# Allegro board HEARINGDEVICE.brd
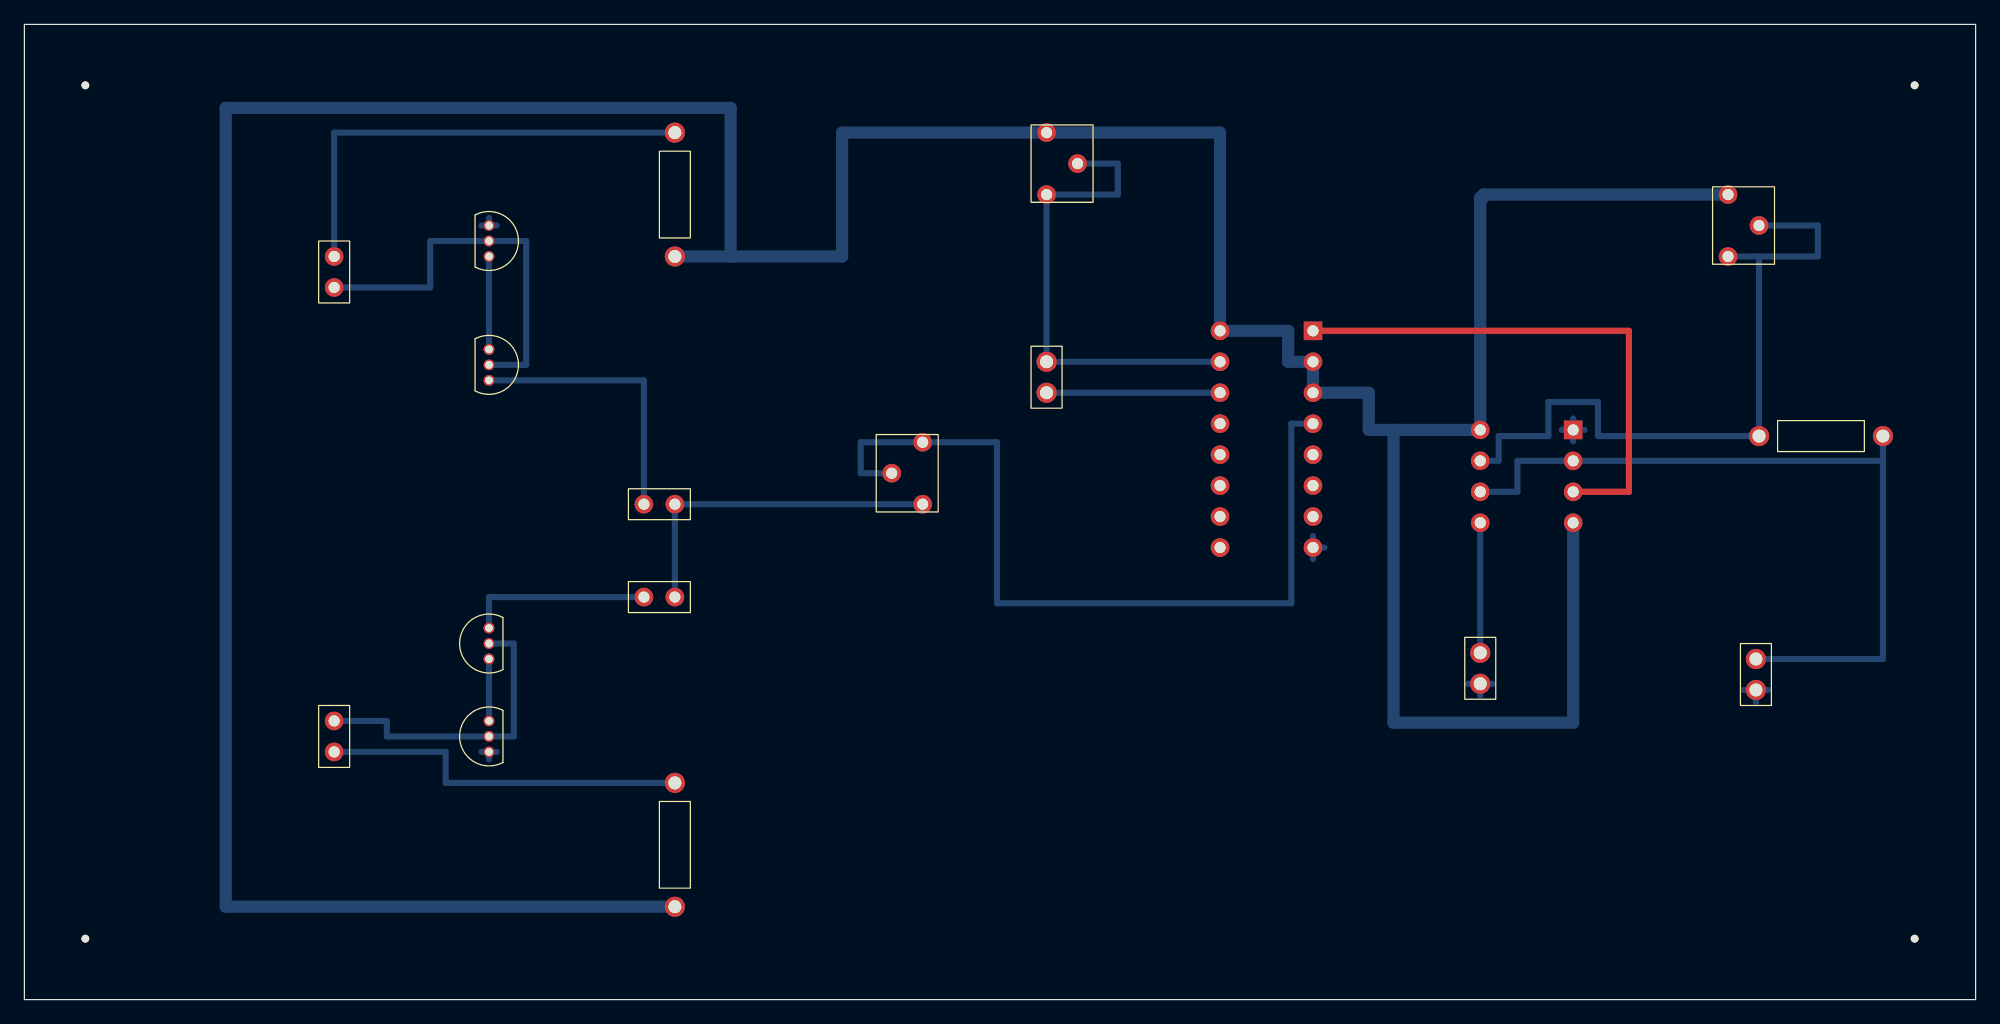
[diagram p0: board, top side]
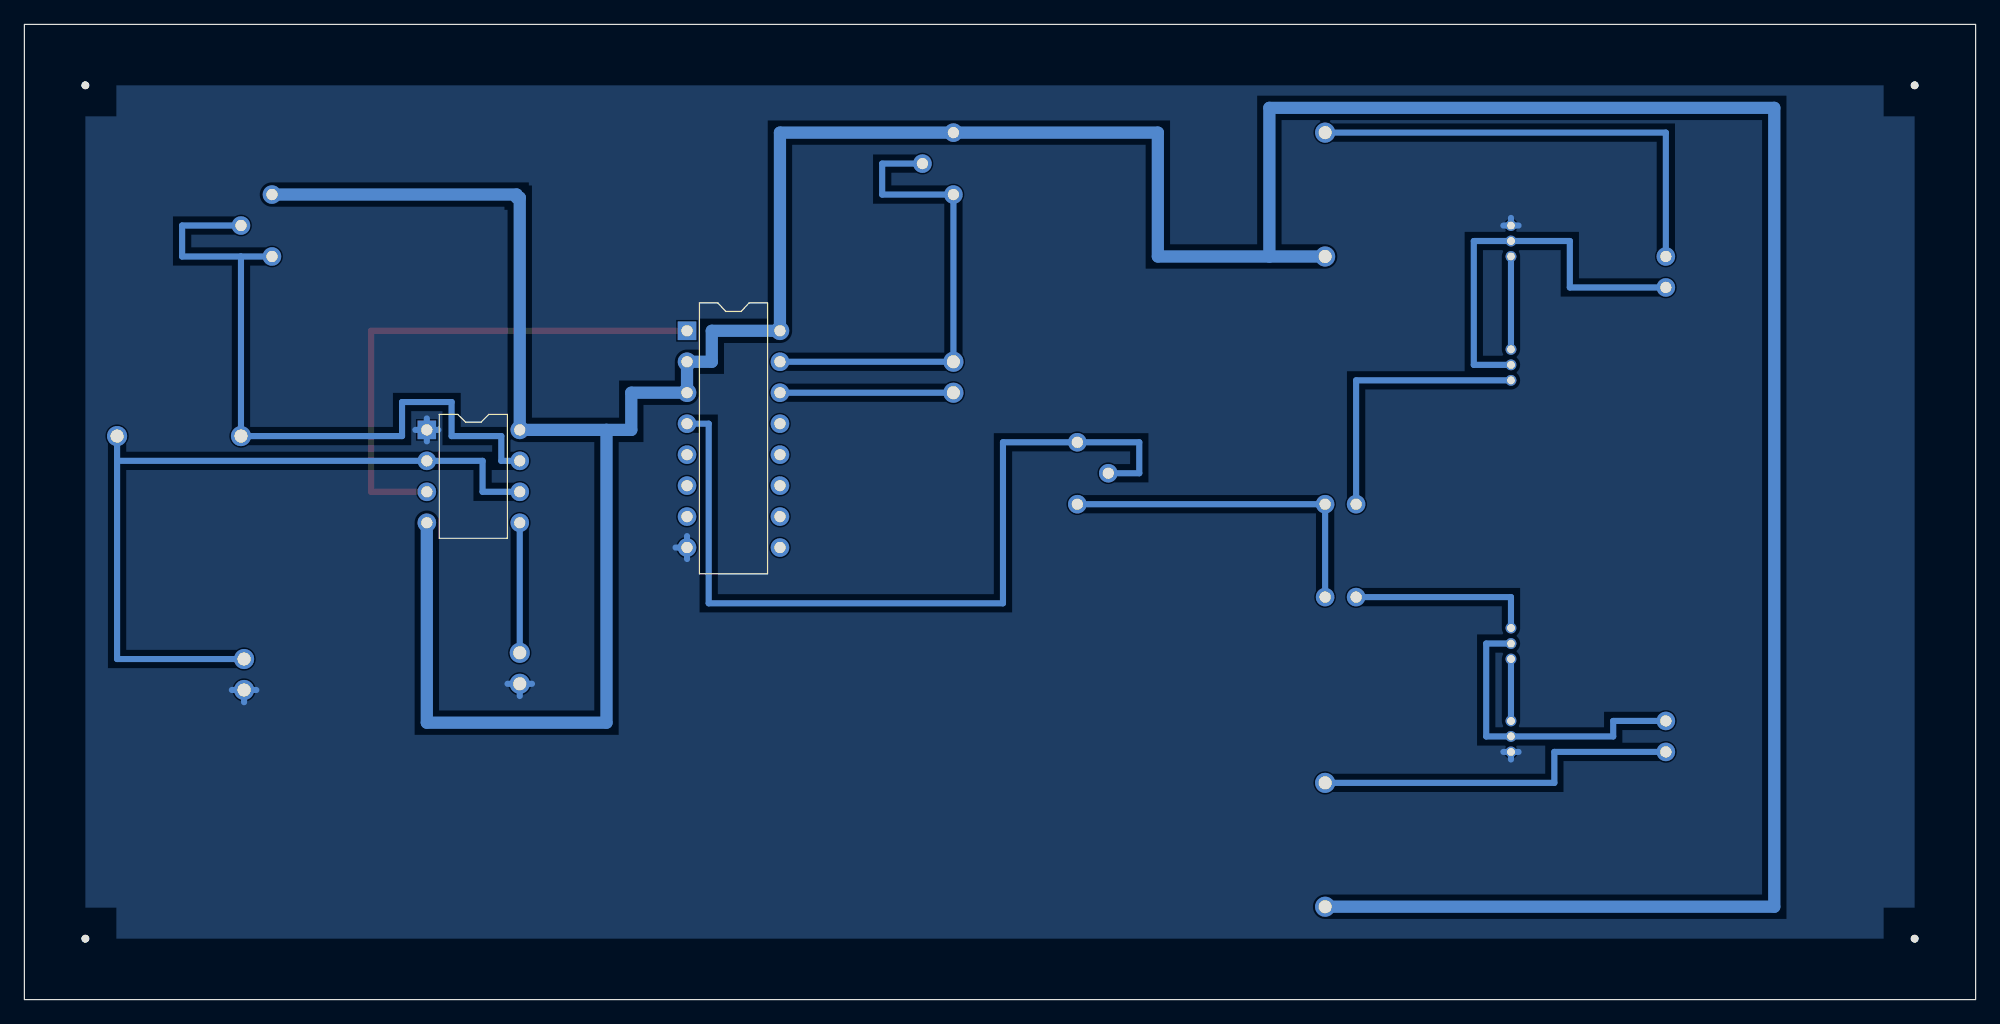
[diagram p1: board, bottom side, seen from below]

Outline 160 x 80 mm; copper layers: TOP, BOTTOM. Coordinates in mm from the lower left corner of the outline.
Outline path: rectangle 0,0 160,80

## Design rules (mm)
nets with their own width: min track width 1; nets GND VCC

## Placement (name value [footprint] x y rotation side)
C1  0.1u  [CAPCK05]  83.82 52.32 180 top
C2  0.1u  [CAPCK05]  141.99 27.94 180 top
C3  0.1u  [CAPCK05]  119.38 28.45 180 top
J1  CON2  [JUMPER2]  25.4 60.96 270 top
J2  CON2  [JUMPER2]  25.4 20.32 90 top
NOREF  -  []  2 78 0 top
NOREF#2  -  []  0 80 0 top
NOREF#3  -  [unnamed#2]  5 75 0 top
NOREF#4  -  [unnamed#2]  155 5 0 top
NOREF#5  -  [unnamed#2]  155 75 0 top
NOREF#6  -  []  160 0 90 top
NOREF#7  -  [unnamed#2]  5 5 0 top
Q1  NPN BCE  [TO92]  38.1 53.34 0 top
Q2  NPN BCE  [TO92]  38.1 63.5 0 top
Q3  NPN BCE  [TO92]  38.1 27.94 180 top
Q4  NPN BCE  [TO92]  38.1 20.32 180 top
R1  22  [RES400]  53.34 60.96 0 top
R2  100k  [RESADJ]  139.7 60.96 180 top
R3  100k  [RESADJ]  83.82 66.04 180 top
R4  1k  [RES400]  142.24 46.23 270 top
R5  1k  [RESADJ]  73.66 45.72 0 top
R6  22  [RES400]  53.34 7.62 0 top
SW1  SW PUSHBUTTON  [JUMPER2]  53.34 40.64 180 top
SW2  SW PUSHBUTTON  [JUMPER2]  50.8 33.02 0 top
U1  NE555  [DIP8_3]  127 46.74 180 bottom
U2  74123  [DIP16_3]  105.66 54.86 180 bottom

## Library data of the parts
C1-C3 = CAP NP: Tolerance: ***; User Part Number: ***
J1 J2 = CON2: User Part Number: ***
Q1-Q3 = NPN BCE_1
Q4 = NPN BCE_3
R1 R4 R6 = R: Tolerance: ***; User Part Number: ***
R2 R3 R5 = RESISTOR VAR: Tolerance: ***; User Part Number: ***
SW1 SW2 = SW PUSHBUTTON: User Part Number: ***
U1 = NE555_1: Tolerance: ***; User Part Number: ***
U2 = 74123_3: Tolerance: ***; User Part Number: ***

## Footprints (pads in the part's own frame, mm; a bottom-side part is the same pattern mirrored in y, then rotated)
CAPCK05
  round 1.651 hole 1.067: 1(0,0) 2(0,2.54)
DIP8_3
  rect 1.524x1.524 hole 0.914: 1(0,0)
  round 1.524 hole 0.914: 2(0,-2.54) 3(0,-5.08) 4(0,-7.62) 5(7.62,-7.62) 6(7.62,-5.08) 7(7.62,-2.54) 8(7.62,0)
DIP16_3
  rect 1.524x1.524 hole 0.914: 1(0,0)
  round 1.524 hole 0.914: 2(0,-2.54) 3(0,-5.08) 4(0,-7.62) 5(0,-10.16) 6(0,-12.7) 7(0,-15.24) 8(0,-17.78) 9(7.62,-17.78) 10(7.62,-15.24) 11(7.62,-12.7) 12(7.62,-10.16) 13(7.62,-7.62) 14(7.62,-5.08) 15(7.62,-2.54) 16(7.62,0)
JUMPER2
  round 1.524 hole 0.914: 1(0,0) 2(2.54,0)
RES400
  round 1.651 hole 1.067: 1(0,0) 2(0,10.16)
RESADJ
  round 1.524 hole 0.914: 1(0,0) 2(-2.54,-2.54) 3(0,-5.08)
TO92
  round 0.889 hole 0.635: 1(0,0) 2(0,-1.27) 3(0,-2.54)
unnamed#2
  round 0.635 hole 3.175 unplated: (0,0)

## Nets
GND: C2.2 C3.2 Q2.1(E) Q4.1(E) U1.1(GND) U2.8(GND)
VCC: R1.1 R2.3(B) R3.3(B) R6.1 U1.4(RST) U1.8(VCC) U2.2(B) U2.3(C\L\R\) U2.16(VCC)
N00839: R2.1(A) R2.2(WIPER) R4.1 U1.7(DSCHG)
N00856: C2.1 R4.2 U1.2(TRG) U1.6(THR)
N00875: C3.1 U1.5(CV)
N00964: U1.3(OUT) U2.1(A\)
N01014: R5.1(A) R5.2(WIPER) U2.4(Q\)
N01018: C1.2 U2.14(C)
N01027: C1.1 R3.1(A) R3.2(WIPER) U2.15(R/C)
N01057: R5.3(B) SW1.1 SW2.2
N01080: Q1.3(B) SW1.2
N01087: Q1.1(E) Q2.3(B)
N01091: J1.2 Q1.2(C) Q2.2(C)
N01139: Q3.3(B) SW2.1
N01146: Q3.1(E) Q4.3(B)
N01156: J2.2 Q3.2(C) Q4.2(C)
N01647: J2.1 R6.2
N015031: J1.1 R1.2

Pads without a net: U2 5 6 7 9 10 11 12 13

## Routing (per net, layer and track width the routed paths; a pad name or vN(x,y) marks a point on that pad's centre or on a via; arc(x,y) is an arc through that point)
GND: length 16.3
  BOTTOM w0.5: 141.99,24.4 C2.2 ; C2.2 140.98,25.4 ; C2.2 142.99,25.4 ; U1.1 127.94,46.74 ; U1.1 127,45.8 ; U1.1 126.06,46.74 ; U1.1 127,47.68 ; 37.48,63.5 Q2.1 ; Q2.1 38.72,63.5 ; Q2.1 38.1,64.12 ; 119.38,24.9 C3.2 ; C3.2 118.38,25.91 ; C3.2 120.38,25.91 ; 38.1,19.7 Q4.1 ; Q4.1 37.48,20.32 ; Q4.1 38.72,20.32 ; 105.66,36.14 U2.8 ; U2.8 105.66,38.02 ; U2.8 106.6,37.08
VCC: length 351.3
  BOTTOM w1: 112.27,46.74 U1.8 119.38,65.79 119.63,65.79 119.63,66.04 R2.3 ; 112.27,46.74 112.27,22.72 127,22.72 U1.4 ; 112.27,46.74 110.24,46.74 110.24,49.78 U2.3 U2.2 103.63,52.32 103.63,54.86 U2.16 98.04,71.12 R3.3 67.06,71.12 67.06,60.96 57.91,60.96 ; R6.1 16.51,7.62 16.51,73.15 57.91,73.15 57.91,60.96 ; R1.1 57.91,60.96
N00839: length 59.9
  BOTTOM w0.5: R2.2 147.07,63.5 147.07,60.96 142.24,60.96 ; 142.24,60.96 R4.1 129.03,46.23 129.03,49.02 124.97,49.02 124.97,46.23 120.89,46.23 120.89,44.2 U1.7 ; 142.24,60.96 R2.1
N00856: length 64.3
  BOTTOM w0.5: 152.4,44.2 R4.2 ; 152.4,44.2 U1.2 122.43,44.2 122.43,41.66 U1.6 ; 152.4,44.2 152.4,27.94 C2.1
N00875: length 10.7
  BOTTOM w0.5: C3.1 U1.5
N00964: length 43.7
  TOP w0.5: U2.1 131.57,54.86 131.57,41.66 U1.3
N01014: length 70.1
  BOTTOM w0.5: R5.2 68.58,43.18 68.58,45.72 R5.1 79.76,45.72 79.76,32.51 103.89,32.51 103.89,47.24 U2.4
N01018: length 14.2
  BOTTOM w0.5: C1.2 U2.14
N01027: length 39.6
  BOTTOM w0.5: R3.2 89.66,68.58 89.66,66.04 R3.1 C1.1 U2.15
N01057: length 27.9
  BOTTOM w0.5: SW2.2 SW1.1 R5.3
N01080: length 22.9
  BOTTOM w0.5: SW1.2 50.8,50.8 Q1.3
N01087: length 7.6
  BOTTOM w0.5: Q2.3 Q1.1
N01091: length 32.8
  BOTTOM w0.5: J1.2 33.27,58.42 33.27,62.23 Q2.2 41.15,62.23 41.15,52.07 Q1.2
N01139: length 15.2
  BOTTOM w0.5: SW2.1 38.1,33.02 Q3.3
N01146: length 5.1
  BOTTOM w0.5: Q4.3 Q3.1
N01156: length 25.7
  BOTTOM w0.5: J2.2 29.72,22.86 29.72,21.59 Q4.2 40.13,21.59 40.13,29.21 Q3.2
N01647: length 30.5
  BOTTOM w0.5: R6.2 34.54,17.78 34.54,20.32 J2.1
N015031: length 38.1
  BOTTOM w0.5: R1.2 25.4,71.12 J1.1

## Copper pours and planes (outline as drawn; the poured copper is in the pictures)
GND on BOTTOM: 5,5 5,75 155,75 155,5

## Text on the board
DIMENSION: FIGURE | SIZE | 0.635 | 0.9144 | 1.0668 | 3.175 | DRILL CHART: TOP to BOTTOM | ALL UNITS ARE IN MILLIMETERS | PLATED | NON-PLATED | QTY | 12 | 41 | 4
